# Altium PCB FlightController.PcbDoc
Units mm, origin at the board's own origin, x right, y up, seen from the top; angles counter-clockwise.
Board outline 102.87 x 102.87 mm, 2 copper layers (Top Layer, Bottom Layer); 83 components, 75 nets, 356 pads, 0 vias.
Unrouted connection lines stored in the file: 232.
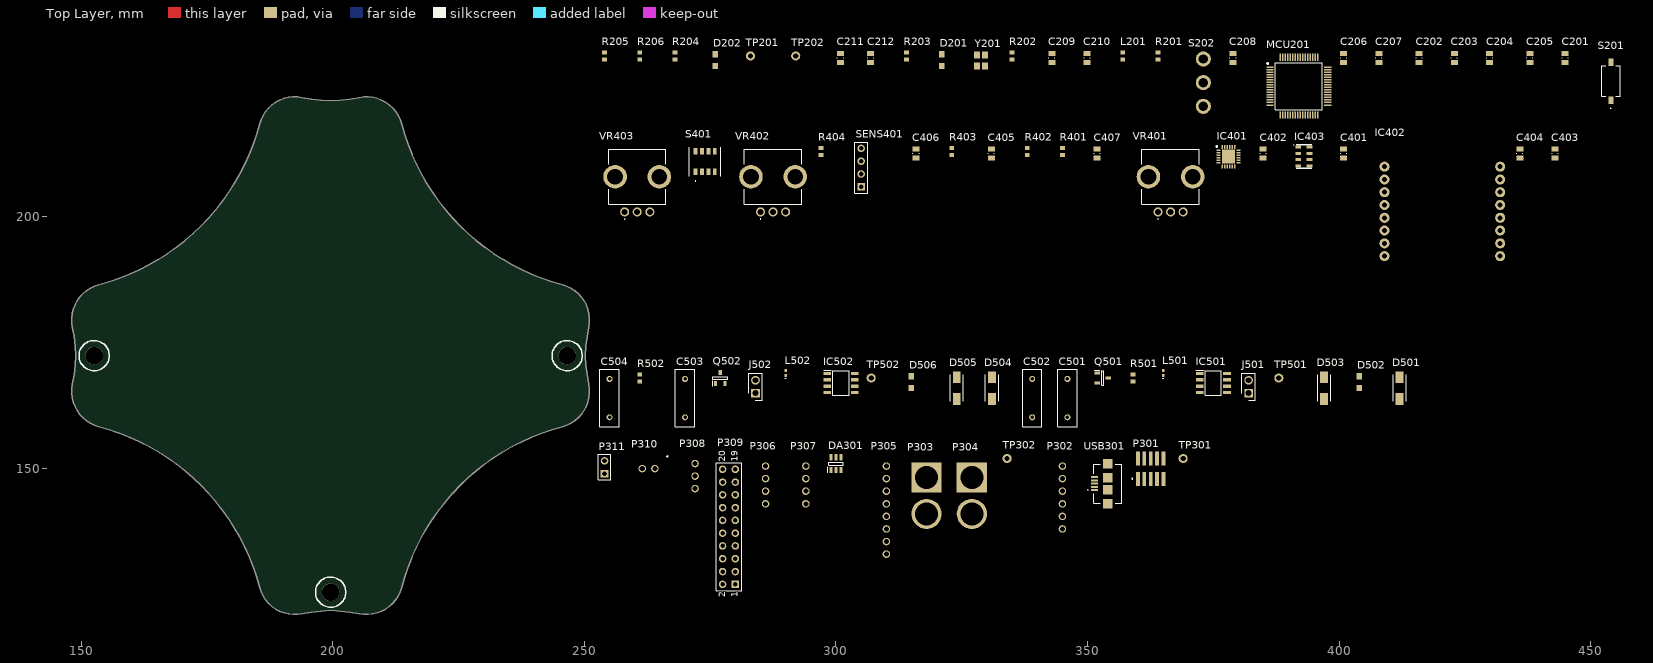
[diagram p0: Top Layer view]
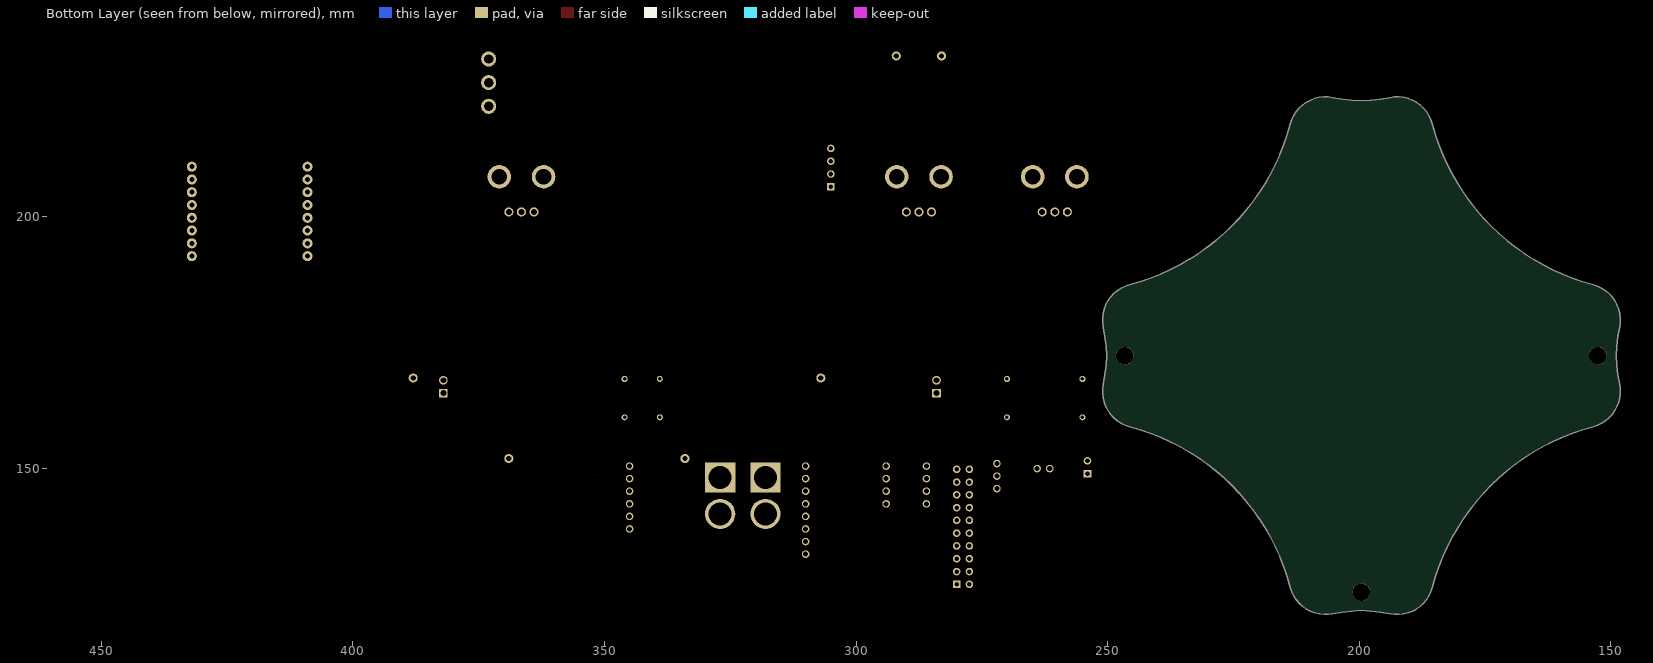
[diagram p1: Bottom Layer view, seen from below]

## Layer stack, top to bottom
Top Solder: solder mask 0.0102, Solder Resist, Dk 3.5
Top Layer: signal copper 0.0356
Dielectric 1: dielectric 0.32, FR-4, Dk 4.8
Bottom Layer: signal copper 0.0356
Bottom Solder: solder mask 0.0102, Solder Resist, Dk 3.5

## Board outline
205.237,121.137 206.139,121.011 207.049,121 207.954,121.103 208.838,121.32 209.688,121.646 210.491,122.076 211.232,122.604 211.902,123.221 212.488,123.918 212.982,124.683 213.375,125.504 213.662,126.368 214.261,128.437 214.958,130.474 215.752,132.476 216.64,134.438 217.622,136.354 218.695,138.222 219.856,140.035 221.103,141.791 222.433,143.485 223.842,145.113 225.328,146.672 226.887,148.158 228.515,149.567 230.209,150.897 231.965,152.144 233.779,153.305 235.646,154.378 237.562,155.36 239.524,156.249 241.526,157.043 243.563,157.739 245.632,158.338 246.496,158.625 247.316,159.018 248.081,159.511 248.777,160.097 249.395,160.766 249.923,161.507 250.353,162.309 250.679,163.158 250.896,164.042 251,164.946 250.989,165.856 250.864,166.757 250.536,168.636 250.314,170.53 250.2,172.434 250.314,174.338 250.536,176.232 250.864,178.111 250.989,179.012 251,179.922 250.896,180.826 250.679,181.71 250.353,182.56 249.923,183.361 249.395,184.102 248.777,184.771 248.081,185.357 247.316,185.85 246.496,186.244 245.632,186.53 243.563,187.129 241.526,187.826 239.524,188.62 237.562,189.509 235.646,190.491 233.779,191.563 231.965,192.725 230.209,193.971 228.515,195.301 226.887,196.71 225.328,198.196 223.842,199.755 222.433,201.383 221.103,203.077 219.856,204.833 218.695,206.647 217.622,208.514 216.64,210.431 215.752,212.392 214.958,214.394 214.261,216.431 213.662,218.5 213.375,219.364 212.982,220.185 212.488,220.95 211.902,221.647 211.232,222.264 210.491,222.792 209.688,223.223 208.838,223.549 207.954,223.765 207.049,223.868 206.139,223.857 205.237,223.731 203.36,223.401 201.468,223.178 199.566,223.062 197.664,223.178 195.772,223.401 193.895,223.731 192.993,223.857 192.083,223.868 191.178,223.765 190.294,223.549 189.444,223.223 188.641,222.792 187.9,222.264 187.23,221.647 186.644,220.95 186.15,220.185 185.757,219.364 185.47,218.5 184.871,216.431 184.175,214.394 183.381,212.392 182.492,210.431 181.51,208.514 180.437,206.647 179.276,204.833 178.029,203.077 176.699,201.383 175.29,199.755 173.804,198.196 172.245,196.71 170.617,195.301 168.923,193.971 167.167,192.725 165.354,191.563 163.486,190.491 161.57,189.509 159.608,188.62 157.606,187.826 155.569,187.129 153.5,186.53 152.636,186.244 151.816,185.85 151.051,185.357 150.355,184.771 149.738,184.102 149.21,183.361 148.779,182.56 148.453,181.71 148.236,180.826 148.132,179.922 148.143,179.012 148.268,178.111 148.596,176.232 148.818,174.338 148.932,172.434 148.818,170.53 148.596,168.636 148.268,166.757 148.143,165.856 148.132,164.946 148.236,164.042 148.453,163.158 148.779,162.309 149.21,161.507 149.738,160.766 150.355,160.097 151.051,159.511 151.816,159.018 152.636,158.625 153.5,158.338 155.569,157.739 157.606,157.043 159.608,156.249 161.57,155.36 163.486,154.378 165.354,153.305 167.167,152.144 168.923,150.897 170.617,149.567 172.245,148.158 173.804,146.672 175.29,145.113 176.699,143.485 178.029,141.791 179.276,140.035 180.437,138.222 181.51,136.354 182.492,134.438 183.381,132.476 184.175,130.474 184.871,128.437 185.47,126.368 185.757,125.504 186.15,124.683 186.644,123.918 187.23,123.221 187.9,122.604 188.641,122.076 189.444,121.646 190.294,121.32 191.178,121.103 192.083,121 192.993,121.011 193.895,121.137 195.772,121.467 197.664,121.69 199.566,121.806 201.468,121.69 203.36,121.467

## Design rules (kind name [scope] priority, off if disabled: settings)
Clearance [All] p1: gap=0.254 ignorepadtopadclearanceinfootprint=FALSE except(0: Arc-Hole Track-Hole SMDPad-Hole THPad-Hole Via-Hole Fill-Hole Poly-Hole Region-Hole Text-Hole)
PolygonConnect [All] p1: connectstyle=Relief reliefconductorwidth=0.254 reliefentries=4 polygonreliefangle="90 Angle" airgapwidth=0.254
RoutingVias [All] p1: holewidth=0.711 width=1.27 viastyle="Through Hole" minholewidth=0.711 minwidth=1.27 maxholewidth=0.711 maxwidth=1.27
SolderMaskExpansion [All] p1: expansion=0.102 istentingtop=FALSE
Width [All] p1: maxlimit=0.254 minlimit=0.254 preferedwidth=0.254
30 further rules are at their usual default settings.

## Classes and differential pairs
component class Sensors: IC402
component class "Power Regulation": Q502

## Components (designator, comment, footprint, x,y, rotation, side; value= is the part's Value field where it differs from the comment)
C201 "Cap" "0805 Cap" 446,230 r90 top value=100nF
C202 "Cap" "0805 Cap" 417,230 r90 top value=100nF
C203 "Cap" "0805 Cap" 424,230 r90 top value=100nF
C204 "Cap" "0805 Cap" 431,230 r90 top value=100nF
C205 "Cap" "0805 Cap" 439,230 r90 top value=100nF
C206 "Cap" "0805 Cap" 402,230 r90 top value=2.2uF
C207 "Cap" "0805 Cap" 409,230 r90 top value=2.2uF
C208 "Cap" "0805 Cap" 380,230 r90 top value=4.7uF
C209 "Cap" "0805 Cap" 344,230 r90 top value=1uF
C210 "Cap" "0805 Cap" 351,230 r90 top value=10nF
C211 "Cap" "0805 Cap" 302,230 r90 top value=10pF
C212 "Cap" "0805 Cap" 308,230 r90 top value=10pF
C401 "Cap" "0805 Cap" 402,211 r90 top value=100nF
C402 "Cap" "0805 Cap" 386,211 r90 top value=2.2uF
C403 "Cap" "0805 Cap" 444,211 r90 top value=100nF
C404 "Cap" "0805 Cap" 437,211 r90 top value=100nF
C405 "Cap" "0805 Cap" 332,211 r90 top value=470nF
C406 "Cap" "0805 Cap" 317,211 r90 top value=10nF
C407 "Cap" "0805 Cap" 353,211 r90 top value=100nF
C501 "Cap" RAD-0.3 346,164 r90 top value=15uF
C502 "Cap" RAD-0.3 339,164 r90 top value=220uF
C503 "Cap" RAD-0.3 270,164 r90 top value=15uF
C504 "Cap" RAD-0.3 255,164 r90 top value=220uF
D201 "LED2" "SML-211 Series" 321,230 r90 top
D202 "LED2" "SML-211 Series" 276,230 r90 top
D501 "B260A" "SMA (DO-214AC)" 412,166 r90 top
D502 "LED2" "SML-211 Series" 404,166 r90 top
D503 "B260A" "SMA (DO-214AC)" 397,166 r90 top
D504 "B260A" "SMA (DO-214AC)" 331,166 r90 top
D505 "B260A" "SMA (DO-214AC)" 324,166 r90 top
D506 "LED2" "SML-211 Series" 315,166 r90 top
DA301 "USBLC6-2SC6" SOT95P280X145-6N 300,151 r90 top
IC401 "ICM-20689" QFN50P400X400X95-25N-D 378,212 r0 top
IC402 "ESP-CAM" ESP-CAM 432,210 r0 top
IC403 "MS561101BA03-50" MS561101BA03-50 393,212 r0 top
IC501 "MIC4680-5.0YM" SOIC127P599X173-8N 375,167 r0 top
IC502 "MIC4680-3.3YM" SOIC127P599X173-8N 301,167 r0 top
J501 "Jumper" "2.54mm 2 pin Jumper" 382,165 r90 top
J502 "Jumper" "2.54mm 2 pin Jumper" 284,165 r90 top
L201 "Inductor" 0603 357,232 r90 top value=39nH
L501 "Inductor" 0402-A 365,169 r90 top value=68uH
L502 "Inductor" 0402-A 290,169 r90 top value=68uH
MCU201 "STM32F045RGT6" QFP50P1200X1200X160-64N 392,226 r0 top
P301 "JTAG Debugging" "TFTSH 1.27mm 10 way" 360,152 r0 top
P302 "SPI Header" B6B-XH-A 345,138 r90 top
P303 "ESC Power" "Female XT60" 318,141 r90 top
P304 "Battery XT60" "Female XT60" 327,141 r90 top
P305 "ESC Connector" B8B-XH-A 310,133 r90 top
P306 "I2C header" B4B-XH-A 286,143 r90 top
P307 "GPS Connector" B4B-XH-A 294,143 r90 top
P308 "RC Receiver" B3B-XH-A 272,146 r90 top
P309 "Spare Pin Output" HDR2X10 280,127 r90 top
P310 "USART Upload" B2B-XH-A 264,150 r0 top
P311 "USART Upload" HDR1X2 254,149 r90 top
Q501 "MOSFET-P" SOT95P230X110-3N 353,168 r0 top
Q502 "MOSFET-P" SOT95P230X110-3N 277,168 r90 top
R201 "0603" 0603 364,232 r90 top value=10K
R202 "0603" 0603 335,232 r90 top value=20
R203 "0603" 0603 314,232 r90 top value=1.5k
R204 "0603" 0603 268,232 r90 top value=1.5k
R205 "0603" 0603 254,232 r90 top value=1.5k
R206 "0603" 0603 261,232 r90 top value=1.5k
R401 "0603" 0603 345,213 r90 top value=10k
R402 "0603" 0603 338,213 r90 top value=10k
R403 "0603" 0603 323,213 r90 top value=10k
R404 "0603" 0603 297,213 r90 top value=10k
R501 "0603" 0603 359,168 r90 top value=3.3k
R502 "0603" 0603 261,168 r90 top value=1.5k
S201 "SW-PB" PTS636SM25JSMTRLFS 454,227 r90 top
S202 "SW-SPDT" "Slide Switch" 373,222 r90 top
S401 "218-4LPSTJRF" 2184LPSTJRF 274,211 r0 top
SENS401 "HC-SR04" HDR1X4 305,206 r90 top
TP201 "Test Point" "Test Point THT 1mm" 283,232 r90 top
TP202 "Test Point" "Test Point THT 1mm" 292,232 r90 top
TP301 "Test Point" "Test Point THT 1mm" 369,152 r90 top
TP302 "Test Point" "Test Point THT 1mm" 334,152 r90 top
TP501 "Test Point" "Test Point THT 1mm" 388,168 r90 top
TP502 "Test Point" "Test Point THT 1mm" 307,168 r90 top
USB301 "USB Micro B" UJ2MIBHGSMTTR 354,147 r90 top
VR401 "PTV09A-4015U-A104" PTV09A4015UA104 364,201 r0 top
VR402 "PTV09A-4015U-A104" PTV09A4015UA104 285,201 r0 top
VR403 "PTV09A-4015U-A104" PTV09A4015UA104 258,201 r0 top
Y201 "TSX-3225" TSX-3225 328,230 r90 top

## Footprints (in the part's own frame and the unit in brackets; to place one, negate y for a bottom-side part, rotate by r counter-clockwise, add the part's x,y. Pads: shape width x height; smd on the part's side, far side on the other; paste and mask are expansions set on the pad)
"2.54mm 2 pin Jumper" [mm] "Headers & Wire Housings KK 100 Hdr Assy Bkwy Bkwy 02 Ckt 30 SGold"
  rect 1.725x1.725 hole 1.15: 1(0,0)
  round 1.725 hole 1.15: 2(2.54,0)
  silkscreen extent -1.4,-1.37 3.94,1.37, body extent -1.27,-1.24 3.81,1.24, height 10.67
0402-A [mm] "Chip Inductor, Body 1.0x0.5mm, IPC High Density"
  rect 0.6x0.5 smd: 1(-0.5,0) 2(0.5,0)
  silkscreen extent -1.1,-0.15 -1.1,0.15, body extent -0.55,-0.3 0.55,0.3, height 0.55
0603 [mm] "Generic 0603 resistor"
  rect 0.8x0.95 smd: 1(-0.675,0) 2(0.675,0)
  body extent -0.87,-0.48 0.87,0.48, height 0.55
"0805 Cap" [mm] "Generic 0805 Cap"
  rect 1x1.4 smd: 1(0.675,1.1) 2(2.525,1.1)
  silkscreen extent 1.55,0.5 1.65,1.7, body extent 0.5,0.38 2.7,1.83, height 1.25
2184LPSTJRF [mm]
  rect 0.76x1.27 smd: 1(-1.905,-2.05) 2(-0.635,-2.05) 3(0.635,-2.05) 4(1.905,-2.05) 5(1.905,2.05) 6(0.635,2.05) 7(-0.635,2.05) 8(-1.905,2.05)
  silkscreen extent -3.13,-3.9 3.13,2.9, body extent -3.13,-2.9 3.13,2.9, height 2.8
B2B-XH-A [mm] "2 pin JST-XH male connector"
  round 1.5 hole 1: 1(0,0) 2(-2.5,0)
  silkscreen extent 2.4,2.3 2.6,2.5, body extent -4.95,-2.37 2.45,3.38, height 2.97
B3B-XH-A [mm] "3 pin JST-XH connector"
  round 1.5 hole 1: 1(0,0) 2(2.5,0) 3(5,0)
  body extent -2.45,-2.37 7.45,3.38, height 7
B4B-XH-A [mm]
  round 1.5 hole 1: 1(0,0) 2(2.5,0) 3(5,0) 4(7.5,0)
  body extent -2.45,-2.37 9.95,3.38, height 7
B6B-XH-A [mm]
  round 1.5 hole 1: 1(0,0) 2(2.5,0) 3(5,0) 4(7.5,0) 5(10,0) 6(12.5,0)
  body extent -2.45,-2.37 14.95,3.38, height 7
B8B-XH-A [mm]
  round 1.5 hole 1: 1(0,0) 2(2.5,0) 3(5,0) 4(7.5,0) 5(10,0) 6(12.5,0) 7(15,0) 8(17.5,0)
  body extent -2.45,-2.37 19.95,3.38, height 7
ESP-CAM [mm]
  round 2 hole 1: 1(0,0) 2(0,-2.54) 3(0,-5.08) 4(0,-7.62) 5(0,-10.16) 6(0,-12.7) 7(0,-15.24) 8(0,-17.78) 9(-23,0) 10(-23,-2.54) 11(-23,-5.08) 12(-23,-7.62) 13(-23,-10.16) 14(-23,-12.7) 15(-23,-15.24) 16(-23,-17.78)
  body extent -25.2,-35.25 1.8,5.25, height 5.97
"Female XT60" [mm]
  round 6 hole 4.6: 1(0,0)
  rect 6x6 hole 4.6: 2(7.2,0)
  body extent -4.5,-4.1 11.8,4.1, height 16.6
HDR1X2 [mm] "Connector; Header; 2 Position"
  rect 1.5x1.5 hole 0.9: 1(0,0)
  round 1.5 hole 0.9: 2(2.54,0)
  silkscreen extent -1.27,-1.27 3.81,1.27
HDR1X4 [mm] "Connector; Header; 4 Position"
  rect 1.5x1.5 hole 0.9: 1(0,0)
  round 1.5 hole 0.9: 2(2.54,0) 3(5.08,0) 4(7.62,0)
  silkscreen extent -1.27,-1.27 8.89,1.27
HDR2X10 [mm] "Connector; Header; 10x2 Position"
  rect 1.5x1.5 hole 0.9: 1(0,0)
  round 1.5 hole 0.9: 2(0,2.54) 3(2.54,0) 4(2.54,2.54) 5(5.08,0) 6(5.08,2.54) 7(7.62,0) 8(7.62,2.54) 9(10.16,0) 10(10.16,2.54) 11(12.7,0) 12(12.7,2.54) 13(15.24,0) 14(15.24,2.54) 15(17.78,0) 16(17.78,2.54) 17(20.32,0) 18(20.32,2.54) 19(22.86,0) 20(22.86,2.54)
  silkscreen extent -1.27,-1.27 24.13,3.81
MS561101BA03-50 [mm]
  rect 1.1x0.6 smd: 1(-1.1,1.875) 2(-1.1,0.625) 3(-1.1,-0.625) 4(-1.1,-1.875) 5(1.1,-1.875) 6(1.1,-0.625) 7(1.1,0.625) 8(1.1,1.875)
  silkscreen extent -2.08,-2.35 1.5,2.35, body extent -1.5,-2.5 1.5,2.5, height 0.95
PTS636SM25JSMTRLFS [mm]
  rect 1.45x1 smd: 1(-3.775,0) 2(3.775,0)
  silkscreen extent -5.45,-1.85 3.05,1.85, body extent -4.4,-1.85 4.4,1.85, height 2.8
PTV09A4015UA104 [mm]
  round 1.8 hole 1.2: 1(0,0) 2(2.5,0) 3(5,0)
  round 4.68 hole 3.12: MH1(-1.9,7) MH2(6.9,7)
  silkscreen extent -3.2,-1.5 8.2,12.5, body extent -3.16,-0.2 8.16,12.4, height 15
QFN50P400X400X95-25N-D [mm]
  rect 0.8x0.3 smd: 1(-1.95,1.25) 2(-1.95,0.75) 3(-1.95,0.25) 4(-1.95,-0.25) 5(-1.95,-0.75) 6(-1.95,-1.25) 13(1.95,-1.25) 14(1.95,-0.75) 15(1.95,-0.25) 16(1.95,0.25) 17(1.95,0.75) 18(1.95,1.25)
  rect 0.3x0.8 smd: 7(-1.25,-1.95) 8(-0.75,-1.95) 9(-0.25,-1.95) 10(0.25,-1.95) 11(0.75,-1.95) 12(1.25,-1.95) 19(1.25,1.95) 20(0.75,1.95) 21(0.25,1.95) 22(-0.25,1.95) 23(-0.75,1.95) 24(-1.25,1.95)
  rect 2.65x2.75 smd: 25(0,0)
  silkscreen extent -2.47,1.88 -2.22,2.12, body extent -2.05,-2.05 2.05,2.05, height 0.95
QFP50P1200X1200X160-64N [mm]
  rect 1.45x0.3 smd: 1(-5.75,3.75) 2(-5.75,3.25) 3(-5.75,2.75) 4(-5.75,2.25) 5(-5.75,1.75) 6(-5.75,1.25) 7(-5.75,0.75) 8(-5.75,0.25) 9(-5.75,-0.25) 10(-5.75,-0.75) 11(-5.75,-1.25) 12(-5.75,-1.75) 13(-5.75,-2.25) 14(-5.75,-2.75) 15(-5.75,-3.25) 16(-5.75,-3.75) 33(5.75,-3.75) 34(5.75,-3.25) 35(5.75,-2.75) 36(5.75,-2.25) 37(5.75,-1.75) 38(5.75,-1.25) 39(5.75,-0.75) 40(5.75,-0.25) 41(5.75,0.25) 42(5.75,0.75) 43(5.75,1.25) 44(5.75,1.75) 45(5.75,2.25) 46(5.75,2.75) 47(5.75,3.25) 48(5.75,3.75)
  rect 0.3x1.45 smd: 17(-3.75,-5.75) 18(-3.25,-5.75) 19(-2.75,-5.75) 20(-2.25,-5.75) 21(-1.75,-5.75) 22(-1.25,-5.75) 23(-0.75,-5.75) 24(-0.25,-5.75) 25(0.25,-5.75) 26(0.75,-5.75) 27(1.25,-5.75) 28(1.75,-5.75) 29(2.25,-5.75) 30(2.75,-5.75) 31(3.25,-5.75) 32(3.75,-5.75) 49(3.75,5.75) 50(3.25,5.75) 51(2.75,5.75) 52(2.25,5.75) 53(1.75,5.75) 54(1.25,5.75) 55(0.75,5.75) 56(0.25,5.75) 57(-0.25,5.75) 58(-0.75,5.75) 59(-1.25,5.75) 60(-1.75,5.75) 61(-2.25,5.75) 62(-2.75,5.75) 63(-3.25,5.75) 64(-3.75,5.75)
  silkscreen extent -6.35,-4.67 4.67,4.67, body extent -6,-6 6,6, height 1.6
RAD-0.3 [mm] "Radial Cap, Thru-Hole; 2 Leads; 0.3 in Pin Spacing"
  round 1.2 hole 0.7: 1(-3.81,0) 2(3.81,0)
  silkscreen extent -5.71,-1.91 5.71,1.91
"Slide Switch" [mm] "RS Pro SPDT Slide switch"
  round 3 hole 1.85: 1(0,0) 2(4.7,0) 3(9.4,0)
  body extent -1.65,-3.3 11.05,3.3, height 10.35
"SMA (DO-214AC)" [mm]
  rect 2.35x1.55 smd: 1(-2.15,0) 2(2.15,0)
  silkscreen extent -2.6,-1.3 2.6,1.3, body extent -2.6,-1.3 2.6,1.3, height 2.3
"SML-211 Series" [mm] "1.8 V LED2012 (0805) SMD"
  rect 1.25x1.1 smd: 1(0,0) 2(2.35,0)
  body extent 0.18,-0.62 2.18,0.63, height 0.8
SOIC127P599X173-8N [mm] "MIC4680 buck converter"
  rect 1.525x0.65 smd: 1(-2.712,1.905) 2(-2.712,0.635) 3(-2.712,-0.635) 4(-2.712,-1.905) 5(2.712,-1.905) 6(2.712,-0.635) 7(2.712,0.635) 8(2.712,1.905)
  silkscreen extent -3.47,-2.44 1.6,2.58, body extent -3,-2.44 3,2.44, height 1.73
SOT95P230X110-3N [mm]
  rect 1.05x0.6 smd: 1(-1.1,0.95) 2(-1.1,-0.95) 3(1.1,0)
  silkscreen extent -1.63,-1.45 0.23,1.5, body extent -1.15,-1.45 1.15,1.45, height 1.1
SOT95P280X145-6N [mm]
  rect 1.2x0.6 smd: 1(-1.25,0.95) 2(-1.25,0) 3(-1.25,-0.95) 4(1.25,-0.95) 5(1.25,0) 6(1.25,0.95)
  silkscreen extent -1.85,-1.46 0.3,1.6, body extent -1.4,-1.46 1.4,1.46, height 1.45
"Test Point THT 1mm" [mm]
  round 1.8 hole 1.05: 1(0,0)
  body extent -1.15,-1.15 1.15,1.15, height 5
"TFTSH 1.27mm 10 way" [mm] "Samtec, FTSH, 10 Way, 2 Row, SMT, Straight Pin Header"
  rect 0.74x2.79 smd: 1(0,-4.07) 2(0,0) 3(1.27,-4.07) 4(1.27,0) 5(2.54,-4.07) 6(2.54,0) 7(3.81,-4.07) 8(3.81,0) 9(5.08,-4.07) 10(5.08,0)
  silkscreen extent -1.2,-4.1 -1,-3.9, body extent -0.63,-4.83 5.72,1.02, height 5.96
TSX-3225 [mm] "EPSON 16MHz Crystal Unit ±10ppm TSX-3225 4-Pin 3.2 x 2.5 x 0.6mm"
  rect 1.4x1.15 smd: 1(0,0) 2(2.2,0) 3(2.2,-1.6) 4(0,-1.6)
UJ2MIBHGSMTTR [mm]
  rect 0.4x1.35 smd: 1(-1.3,2.64) 2(1.3,2.64) 3(-0.65,2.64) 4(0,2.64) 5(0.65,2.64)
  round 0.275 hole 0.55 unplated: MH1(-2,2.115) MH2(2,2.115)
  rect 1.9x1.9 smd: MP1(-3.95,-0.035) MP2(-1.2,-0.035) MP3(1.2,-0.035) MP4(3.95,-0.035)
  silkscreen extent -3.9,-2.82 3.9,4, body extent -4.05,-2.81 4.05,2.83, height 2.7

## Part data
C201 C202 C203 C204 C205 C208 C209 C210 C211 C212 C401 C402 C403 C404 C405 C406 C407 C501 C502 C503 C504: "Capacitor", ComponentLink1Description=Purchase
  C201 C202 C203 C204 C205 C401 C402 C403 C404 C405 C406 C407: ComponentLink1URL=https://uk.rs-online.com/web/p/mlccs-multilayer-ceramic-capacitors/6480957/, LatestRevisionDate=17-Jul-2002, LatestRevisionNote="Re-released for DXP Platform.", PackageDescription="Radial Cap, Thru-Hole; 2 Leads; 0.3 in Pin Spacing", PackageReference=RAD-0.3, Published=8-Jun-2000, Publisher="Altium Limited"
  C208: ComponentLink1URL=https://uk.rs-online.com/web/p/mlccs-multilayer-ceramic-capacitors/7883041/, LatestRevisionDate=17-Jul-2002, LatestRevisionNote="Re-released for DXP Platform.", PackageDescription="Radial Cap, Thru-Hole; 2 Leads; 0.3 in Pin Spacing", PackageReference=RAD-0.3, Published=8-Jun-2000, Publisher="Altium Limited"
  C209: ComponentLink1URL=https://uk.rs-online.com/web/p/mlccs-multilayer-ceramic-capacitors/7883054/, LatestRevisionDate=17-Jul-2002, LatestRevisionNote="Re-released for DXP Platform.", PackageDescription="Radial Cap, Thru-Hole; 2 Leads; 0.3 in Pin Spacing", PackageReference=RAD-0.3, Published=8-Jun-2000, Publisher="Altium Limited"
  C210: ComponentLink1URL=https://uk.rs-online.com/web/p/mlccs-multilayer-ceramic-capacitors/6983462/, LatestRevisionDate=17-Jul-2002, LatestRevisionNote="Re-released for DXP Platform.", PackageDescription="Radial Cap, Thru-Hole; 2 Leads; 0.3 in Pin Spacing", PackageReference=RAD-0.3, Published=8-Jun-2000, Publisher="Altium Limited"
  C211 C212: ComponentLink1URL=https://uk.rs-online.com/web/p/mlccs-multilayer-ceramic-capacitors/6984033/, LatestRevisionDate=17-Jul-2002, LatestRevisionNote="Re-released for DXP Platform.", PackageDescription="Radial Cap, Thru-Hole; 2 Leads; 0.3 in Pin Spacing", PackageReference=RAD-0.3, Published=8-Jun-2000, Publisher="Altium Limited"
  C501 C503: ComponentLink1URL=https://www.mouser.co.uk/ProductDetail/AVX/TCJD156M050R0150E?qs=sGAEpiMZZMsh%252B1woXyUXj30ZYomYlxpXlsnYS6Rt2k0%3D
  C502 C504: ComponentLink1URL=https://www.mouser.co.uk/ProductDetail/AVX/TPSE227M016R0100V?qs=sGAEpiMZZMsh%252B1woXyUXj9XiUh8Ris1mU7xnb1KYOWk%3D
C206 C207: "Low ESR Capacitor", ComponentLink1Description=Purchase, ComponentLink1URL=https://uk.rs-online.com/web/p/mlccs-multilayer-ceramic-capacitors/7883048/, LatestRevisionDate=17-Jul-2002, LatestRevisionNote="Re-released for DXP Platform.", PackageDescription="Radial Cap, Thru-Hole; 2 Leads; 0.3 in Pin Spacing", PackageReference=RAD-0.3, Published=8-Jun-2000, Publisher="Altium Limited"
D201 D202 D502 D506: "Typical RED, GREEN, YELLOW, AMBER GaAs LED", ComponentLink1Description=Purchase
  D201: ComponentLink1URL=https://uk.rs-online.com/web/p/leds/7007907/
  D202 D502 D506: ComponentLink1URL=https://uk.rs-online.com/web/p/leds/7007897/
D501 D503 D504 D505: library part "D Schottky", "Schottky Diode", ComponentLink1Description=Purchase, ComponentLink1URL=https://www.mouser.co.uk/ProductDetail/Diodes-Incorporated/B260A-13-F?qs=9XwZYT68TnR%252B3fnyovGFLA%3D%3D
DA301: "TMicroelectronics USBLC6-2SC6, Dual-Element Uni-Directional TVS Diode Array, 6-Pin SOT-23", ComponentLink1Description=Purchase, ComponentLink1URL=https://uk.rs-online.com/web/p/tvs-diodes/6247693/
IC401: "Integrated Circuit", Manufacturer_Name=TDK, Mouser2 Part Number=410-ICM-20689, Datasheet Link=https://componentsearchengine.com//ICM-20689.pdf, Height=0.95mm, Manufacturer_Part_Number=ICM-20689, Mouser2 Price/Stock=https://www.mouser.com/Search/Refine.aspx?Keyword=410-ICM-20689
IC403: "Integrated Circuit Note, Mouser Chepaer", Manufacturer_Name="TE Connectivity", Mouser2 Part Number=824-MS561101BA03-50, ComponentLink1Description=Purchase, ComponentLink1URL=https://uk.rs-online.com/web/p/pressure-sensor-ics/8937130/, Datasheet Link=https://componentsearchengine.com//MS561101BA03-50.pdf, Manufacturer_Part_Number=MS561101BA03-50, Mouser2 Price/Stock=https://www.mouser.com/Search/Refine.aspx?Keyword=824-MS561101BA03-50
IC501: "Switching Voltage Regulators 1.3A SuperSwitcher (5v)", Manufacturer_Name=Microchip, ComponentLink1Description=Purchase, ComponentLink1URL=https://www.mouser.co.uk/ProductDetail/Microchip-Technology-Micrel/MIC4680-50YM-TR?qs=Y3Q3JoKAO1TW71A%252BUV2KaQ%3D%3D, Datasheet Link=http://ww1.microchip.com/downloads/en/DeviceDoc/mic4680.pdf, Height=1.73mm, Manufacturer_Part_Number=MIC4680-5.0YM
IC502: "Integrated Circuit", Manufacturer_Name=Microchip, ComponentLink1Description=Purchase, ComponentLink1URL=https://www.mouser.co.uk/ProductDetail/Microchip-Technology-Micrel/MIC4680-33YM?qs=kh6iOki%2FeLEl7qvTxSy9RA==, Datasheet Link=http://ww1.microchip.com/downloads/en/DeviceDoc/mic4680.pdf, Height=1.73mm, Manufacturer_Part_Number=MIC4680-3.3YM
P301: library part "Header 5X2", "Samtec, FTSH, 10 Way, 2 Row, Straight Pin Header", MFr No.=FTSH-105-01-L-DV, ComponentLink1Description=Purchase, ComponentLink1URL=https://uk.rs-online.com/web/p/pcb-headers/0451736/, Publisher="University of Bath"
P302: library part "Header 6", "Header, 6-Pin", LatestRevisionDate=17-Jul-2002, LatestRevisionNote="Re-released for DXP Platform.", Publisher="Altium Limited"
P303 P304 P311: library part "Header 2", "Header, 2-Pin", LatestRevisionDate=17-Jul-2002, LatestRevisionNote="Re-released for DXP Platform.", Publisher="Altium Limited"
P305: library part "Header 8", "Header, 8-Pin", LatestRevisionDate=17-Jul-2002, LatestRevisionNote="Re-released for DXP Platform.", Publisher="Altium Limited"
P306 P307: library part "Header 4", "Header, 4-Pin", LatestRevisionDate=17-Jul-2002, LatestRevisionNote="Re-released for DXP Platform.", Publisher="Altium Limited"
P308: library part "Header 3", "Header, 3-Pin", LatestRevisionDate=17-Jul-2002, LatestRevisionNote="Re-released for DXP Platform.", Publisher="Altium Limited"
P309: library part "Header 10X2", "Header, 10-Pin, Dual row", LatestRevisionDate=17-Jul-2002, LatestRevisionNote="Re-released for DXP Platform.", Publisher="Altium Limited"
P310: library part "Header 2", "Compass Connector", LatestRevisionDate=17-Jul-2002, LatestRevisionNote="Re-released for DXP Platform.", Publisher="Altium Limited"
Q501 Q502: "P-Channel MOSFET", ComponentLink1Description=Purchase, ComponentLink1URL=https://www.mouser.co.uk/ProductDetail/Nexperia/PMV250EPEAR?qs=Yna0arPQ0CTtAa8k6X9CyQ%3D%3D
R201 R202 R203 R204 R205 R206 R401 R402 R403 R404 R501 R502: library part Res1, "Resistor", ComponentLink1Description=Purcahse, LatestRevisionDate=17-Jul-2002, LatestRevisionNote="Re-released for DXP Platform.", PackageDescription="Axial Device, Thru-Hole; 2 Leads; 0.3 in Pin Spacing", PackageReference=AXIAL-0.3, Published=8-Jun-2000, Publisher="Altium Limited"
  R201 R203 R204 R205 R206 R401 R402 R403 R404 R501 R502: ComponentLink1URL=https://uk.rs-online.com/web/p/mlccs-multilayer-ceramic-capacitors/2644236/
  R202: ComponentLink1URL=https://uk.rs-online.com/web/p/surface-mount-fixed-resistors/6661904/
S201: "Switch", ComponentLink1Description=Purchase, ComponentLink1URL=https://www.mouser.co.uk/ProductDetail/CK/PTS636-SM25J-SMTR-LFS?qs=vLWxofP3U2zGz0hgscFyyw%3D%3D
S202: "SPDT Subminiature Toggle Switch, Right Angle Mounting, Vertical Actuation", ComponentLink1Description=Purchase, ComponentLink1URL=https://uk.rs-online.com/web/p/slide-switches/7347334/, PackageDescription="Switch; 4 Leads"
S401: "DIP Switches/SIP Switches SURFACE MOUNT, GOLD, HALF-PITCH DIP SWITCH, 4-POLE, LOW PROFILE ACTUATOR, BOTTOM SEAL, TAPE SEAL, J-BEND, REEL, OFF", Manufacturer_Name=CTS, Datasheet Link=https://www.ctscorp.com/wp-content/uploads/218.pdf, Height=2.7mm, Manufacturer_Part_Number=218-4LPSTJRF
SENS401: library part "Header 4", "Ultrasonic Distance Sensor", LatestRevisionDate=17-Jul-2002, LatestRevisionNote="Re-released for DXP Platform.", Publisher="Altium Limited"
USB301: "Molex USB Connector, SMT, Socket 2.0 B, Solder, Right Angle", MFr No=47642-0001, ComponentLink1Description=Purchase, ComponentLink1URL=https://uk.rs-online.com/web/p/usb-connectors/8967419/
VR401 VR402 VR403: "Variable Resistor", Manufacturer_Name=Bourns, Datasheet Link=https://www.bourns.com/docs/Product-Datasheets/PTV09.pdf, Height=15.5mm, Manufacturer_Part_Number=PTV09A-4015U-A104
Y201: "EPSON 16MHz Crystal Unit ±10ppm TSX-3225 4-Pin", ComponentLink1Description=Purcahse, ComponentLink1URL=https://uk.rs-online.com/web/p/crystal-units/9047516/
J501 J502: Purchase=https://www.mouser.co.uk/ProductDetail/Molex/22-28-5027?qs=l%252BWx29wYPrz7EnZr1XjkzQ%3D%3D
L201: Code_IEC=1005, Code_JEITA=0402, ComponentLink1Description=Purchase, ComponentLink1URL=https://uk.rs-online.com/web/p/multilayer-surface-mount-inductors/7859212/, LatestRevisionDate=29-May-2009, LatestRevisionNote="IPC-7351 Footprint Added.", PackageDescription="Chip Inductor", PackageReference=0402-A, Published=8-Jun-2000, Publisher="Altium Limited"
L501 L502: Code_IEC=1005, Code_JEITA=0402, LatestRevisionDate=29-May-2009, LatestRevisionNote="IPC-7351 Footprint Added.", PackageDescription="Chip Inductor", PackageReference=0402-A, Published=8-Jun-2000, Publisher="Altium Limited"
TP201 TP202 TP301 TP302 TP501 TP502: ComponentLink1Description=Purchase, ComponentLink1URL=https://uk.rs-online.com/web/p/terminal-posts/2622179/?relevancy-data=7365617263685F636173636164655F6F726465723D31267365617263685F696E746572666163655F6E616D653D4931384E525353746F636B4E756D626572267365617263685F6C616E67756167655F757365643D656E267365617263685F6D617463685F6D6F64653D6D61746368616C6C267365617263685F7061747465726E5F6D6174636865643D5E2828282872737C5253295B205D3F293F285C647B337D5B5C2D5C735D3F5C647B332C347D5B705061415D3F29297C283235285C647B387D7C5C647B317D5C2D5C647B377D29292924267365617263685F7061747465726E5F6F726465723D31267365617263685F73745F6E6F726D616C697365643D59267365617263685F726573706F6E73655F616374696F6E3D267365617263685F747970653D52535F53544F434B5F4E554D424552267365617263685F77696C645F63617264696E675F6D6F64653D4E4F4E45267365617263685F6B6579776F72643D3236322D32313739267365617263685F6B6579776F72645F6170703D32363232313739267365617263685F636F6E6669673D3026&searchHistory=%7B%22enabled%22%3Atrue%7D\

## Free pads (board coordinates)
  round 3.5 hole 3.5: 1(152.566,172.434) 1(199.566,125.434) 1(246.566,172.434)

## Nets (pads, with @x,y where several pads share a name; then routed paths per layer and width w, separated by ;. In a path a pad name is that pad's centre, name@x,y a point inside that pad or via, vN(x,y) a via of type N, cw(c..) or ccw(c..) an arc to the next point about the centre after c; other vN are vias at no path point)
GND: C201.1 C202.1 C203.1 C204.1 C205.1 C206.2 C207.2 C208.1 C209.1 C210.1 C211.1 C212.1 C401.1 C402.1 C403.1 C404.1 C405.2 C406.2 C407.1 C501.1 C502.1 C503.1 C504.1 D503.1 D505.1 DA301.2 IC401.9 IC401.11 IC401.18 IC402.2 IC402.12 IC402.16 IC403.3 IC403.4 IC403.5 IC501.1 IC501.5 IC501.6 IC501.7 IC501.8 IC502.1 IC502.5 IC502.6 IC502.7 IC502.8 MCU201.12 MCU201.18 MCU201.63 P301.3 P301.5 P301.9 P302.6 P303.2 P304.2 P305.8 P306.4 P307.4 Q501.1 Q502.1 R203.1 R204.1 R501.1 R502.1 S201.2 S202.3 S401.1 S401.2 S401.3 S401.4 SENS401.1 USB301.4 USB301.5 VR401.3 VR401.MH1 VR401.MH2 VR402.3 VR402.MH1 VR402.MH2 VR403.3 VR403.MH1 VR403.MH2 Y201.2 Y201.4
NetC201_2: C201.2 MCU201.7 P301.10 S201.1
NetC206_1: C206.1 MCU201.31
NetC207_1: C207.1 MCU201.47
NetC211_2: C211.2 MCU201.5 Y201.1
NetC212_2: C212.2 R202.1 Y201.3
NetC405_1: C405.1 IC401.10
NetC501_2: C501.2 IC501.2 Q501.3
NetC503_2: C503.2 IC502.2 J502.2 Q502.3
NetD201_1: D201.1 MCU201.3
NetD201_2: D201.2 R203.2
NetD202_1: D202.1 MCU201.4
NetD202_2: D202.2 R204.2
NetD501_2: D501.2 J501.1
NetD502_2: D502.2 R501.2
NetD503_2: D503.2 IC501.3 L501.1
NetD504_2: D504.2 J502.1
NetD505_2: D505.2 IC502.3 L502.1
NetD506_2: D506.2 R502.2
NetDA301_1: DA301.1 MCU201.44
NetDA301_3: DA301.3 MCU201.45
NetDA301_4: DA301.4 USB301.3
NetDA301_6: DA301.6 USB301.2
NetIC401_12: IC401.12 MCU201.40
NetIC401_23: IC401.23 IC403.8 MCU201.29 P306.3 P310.2 R205.2 TP201.1
NetIC401_24: IC401.24 IC403.7 MCU201.30 P306.2 P310.1 R206.2 TP202.1
NetIC402_14: IC402.14 MCU201.14
NetIC402_15: IC402.15 MCU201.15
NetMCU201_2: MCU201.2 P309.14
NetMCU201_6: MCU201.6 R202.2
NetMCU201_8: MCU201.8 P309.2
NetMCU201_9: MCU201.9 P302.4
NetMCU201_10: MCU201.10 VR401.2
NetMCU201_11: MCU201.11 VR402.2
NetMCU201_16: MCU201.16 P307.2
NetMCU201_17: MCU201.17 P307.3
NetMCU201_20: MCU201.20 P309.1
NetMCU201_21: MCU201.21 P302.1
NetMCU201_22: MCU201.22 P302.2
NetMCU201_23: MCU201.23 P302.3
NetMCU201_24: MCU201.24 VR403.2
NetMCU201_25: MCU201.25 R404.2 S401.5
NetMCU201_26: MCU201.26 P309.7
NetMCU201_27: MCU201.27 P309.9
NetMCU201_28: MCU201.28 P309.11
NetMCU201_33: MCU201.33 P309.15
NetMCU201_34: MCU201.34 SENS401.2
NetMCU201_35: MCU201.35 SENS401.3
NetMCU201_36: MCU201.36 P309.17
NetMCU201_37: MCU201.37 R403.2 S401.6
NetMCU201_38: MCU201.38 R402.2 S401.7
NetMCU201_39: MCU201.39 R401.2 S401.8
NetMCU201_41: MCU201.41 P309.3
NetMCU201_42: MCU201.42 P311.1
NetMCU201_43: MCU201.43 P311.2
NetMCU201_46: MCU201.46 P301.2
NetMCU201_49: MCU201.49 P301.4
NetMCU201_50: MCU201.50 P309.5
NetMCU201_51: MCU201.51 P308.2
NetMCU201_52: MCU201.52 P308.3
NetMCU201_53: MCU201.53 P309.12
NetMCU201_55: MCU201.55 P301.6
NetMCU201_56: MCU201.56 P309.13
NetMCU201_57: MCU201.57 P305.2
NetMCU201_58: MCU201.58 P305.6
NetMCU201_59: MCU201.59 P305.5
NetMCU201_60: MCU201.60 R201.2
NetMCU201_61: MCU201.61 P305.4
NetMCU201_62: MCU201.62 P305.3
NetR201_1: R201.1 S202.2
VBATT: P303.1 P304.1 Q501.2 Q502.2 TP302.1
"VDD 3.3V": C202.2 C203.2 C204.2 C205.2 C208.2 C401.2 C402.2 C403.2 C404.2 C406.1 C407.2 C504.2 D506.1 IC401.8 IC401.13 IC402.9 IC403.1 IC403.2 IC502.4 L201.1 L502.2 MCU201.1 MCU201.19 MCU201.32 MCU201.48 MCU201.64 P301.1 P302.5 P306.1 R205.1 R206.1 R401.1 R402.1 R403.1 R404.1 S202.1 TP502.1 VR401.1 VR402.1 VR403.1
"VDD 5V": C502.2 D502.1 IC501.4 J501.2 L501.2 P307.1 P308.1 SENS401.4 TP501.1
"VDD USB 5V": D501.1 D504.1 DA301.5 TP301.1 USB301.1
VDDA: C209.2 C210.2 L201.2 MCU201.13
pads on no net: IC401.1 IC401.2 IC401.3 IC401.4 IC401.5 IC401.6 IC401.7 IC401.14 IC401.15 IC401.16 IC401.17 IC401.19 IC401.20 IC401.21 IC401.22 IC401.25 IC402.1 IC402.3 IC402.4 IC402.5 IC402.6 IC402.7 IC402.8 IC402.10 IC402.11 IC402.13 IC403.6 MCU201.54 P301.7 P301.8 P305.1 P305.7 P309.4 P309.6 P309.8 P309.10 P309.16 P309.18 P309.19 P309.20 USB301.MH1 USB301.MH2 USB301.MP1 USB301.MP2 USB301.MP3 USB301.MP4

## Silkscreen, mask and mechanical layers (free items; w line width, h text height)
Top Overlay:
  circle w0.254: c246.566,172.434 r3
  circle w0.254: c199.566,125.434 r3
  circle w0.254: c152.566,172.434 r3

## Text inside footprints (layer, text, board x,y; h text height)
P309: Top Overlay "20" at 277.968,151.384 h1.27 r90; Top Overlay "19" at 280.508,151.384 h1.27 r90; Top Overlay "1" at 280.508,124.46 h1.27 r90; Top Overlay "2" at 277.968,124.46 h1.27 r90